# Altium PCB User_Interface.PcbDoc
Units mil, origin at the board's own origin, x right, y up, seen from the top; angles counter-clockwise.
Board outline 7874.02 x 5314.96 mil, 2 copper layers (Top Layer, Bottom Layer); 51 components, 43 nets, 132 pads, 0 vias.
Unrouted connection lines stored in the file: 89.
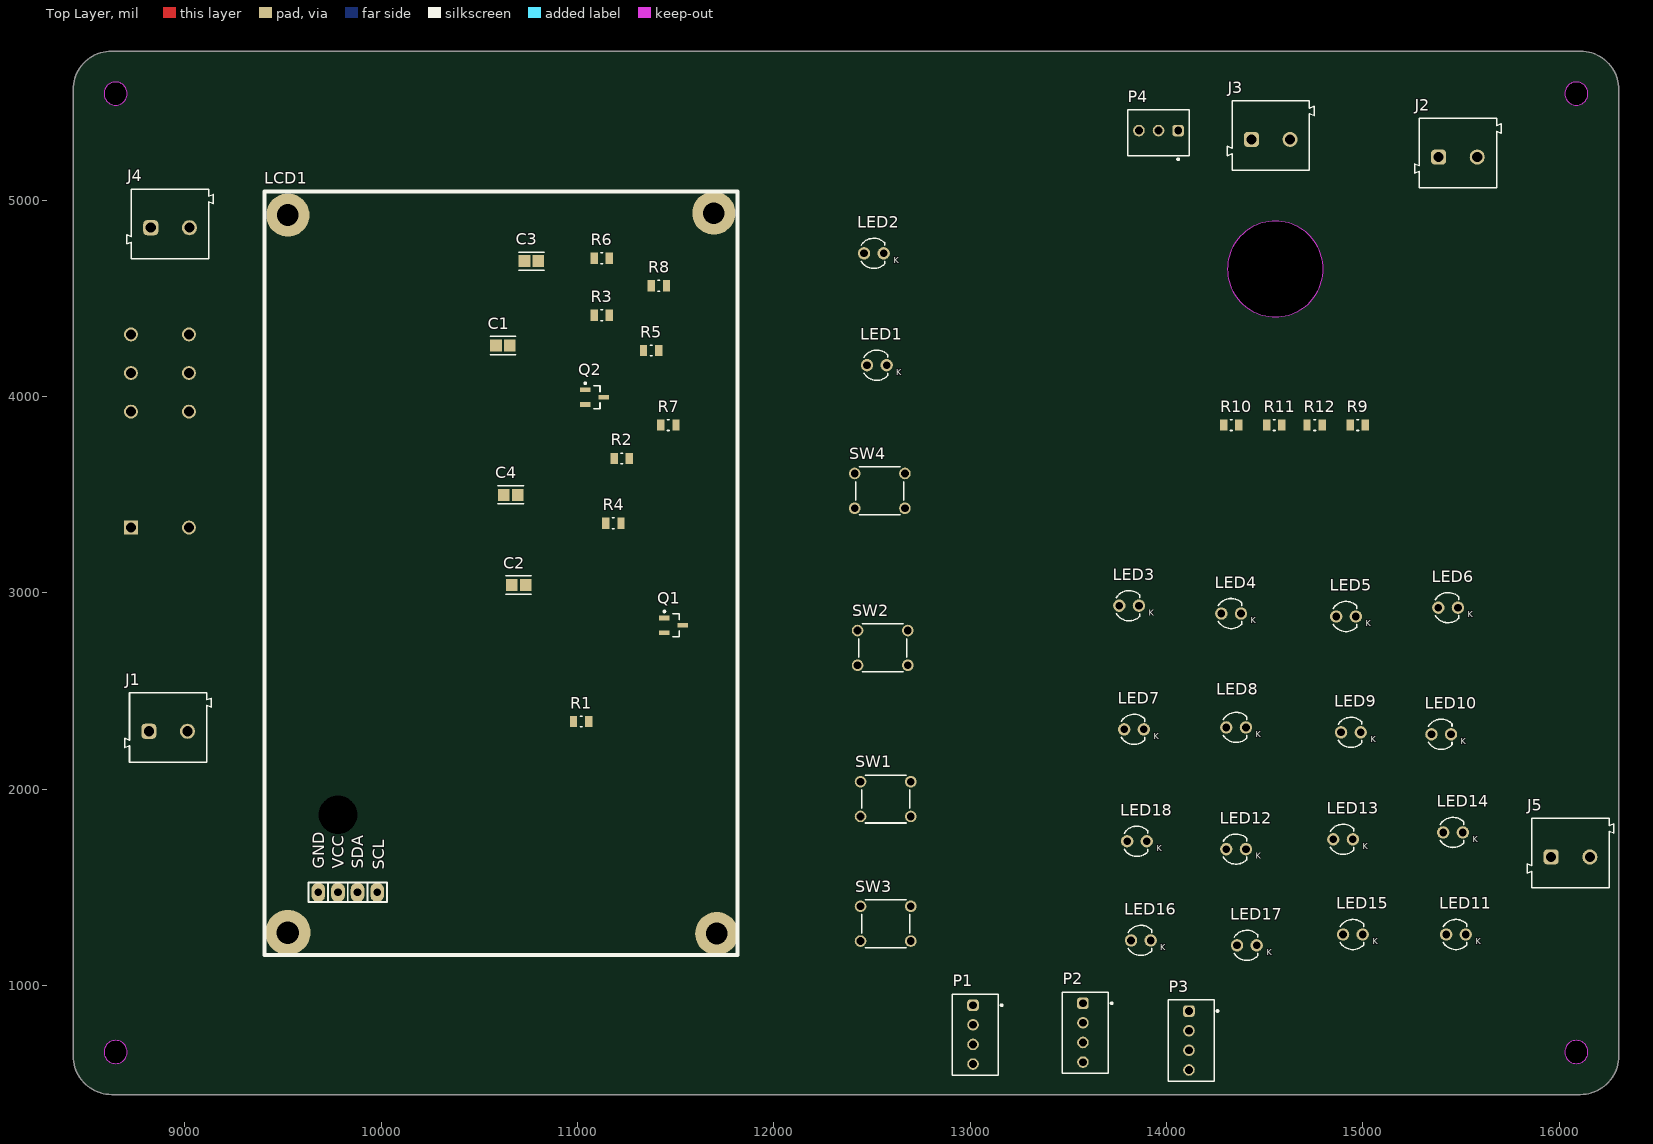
[diagram p0: Top Layer view]
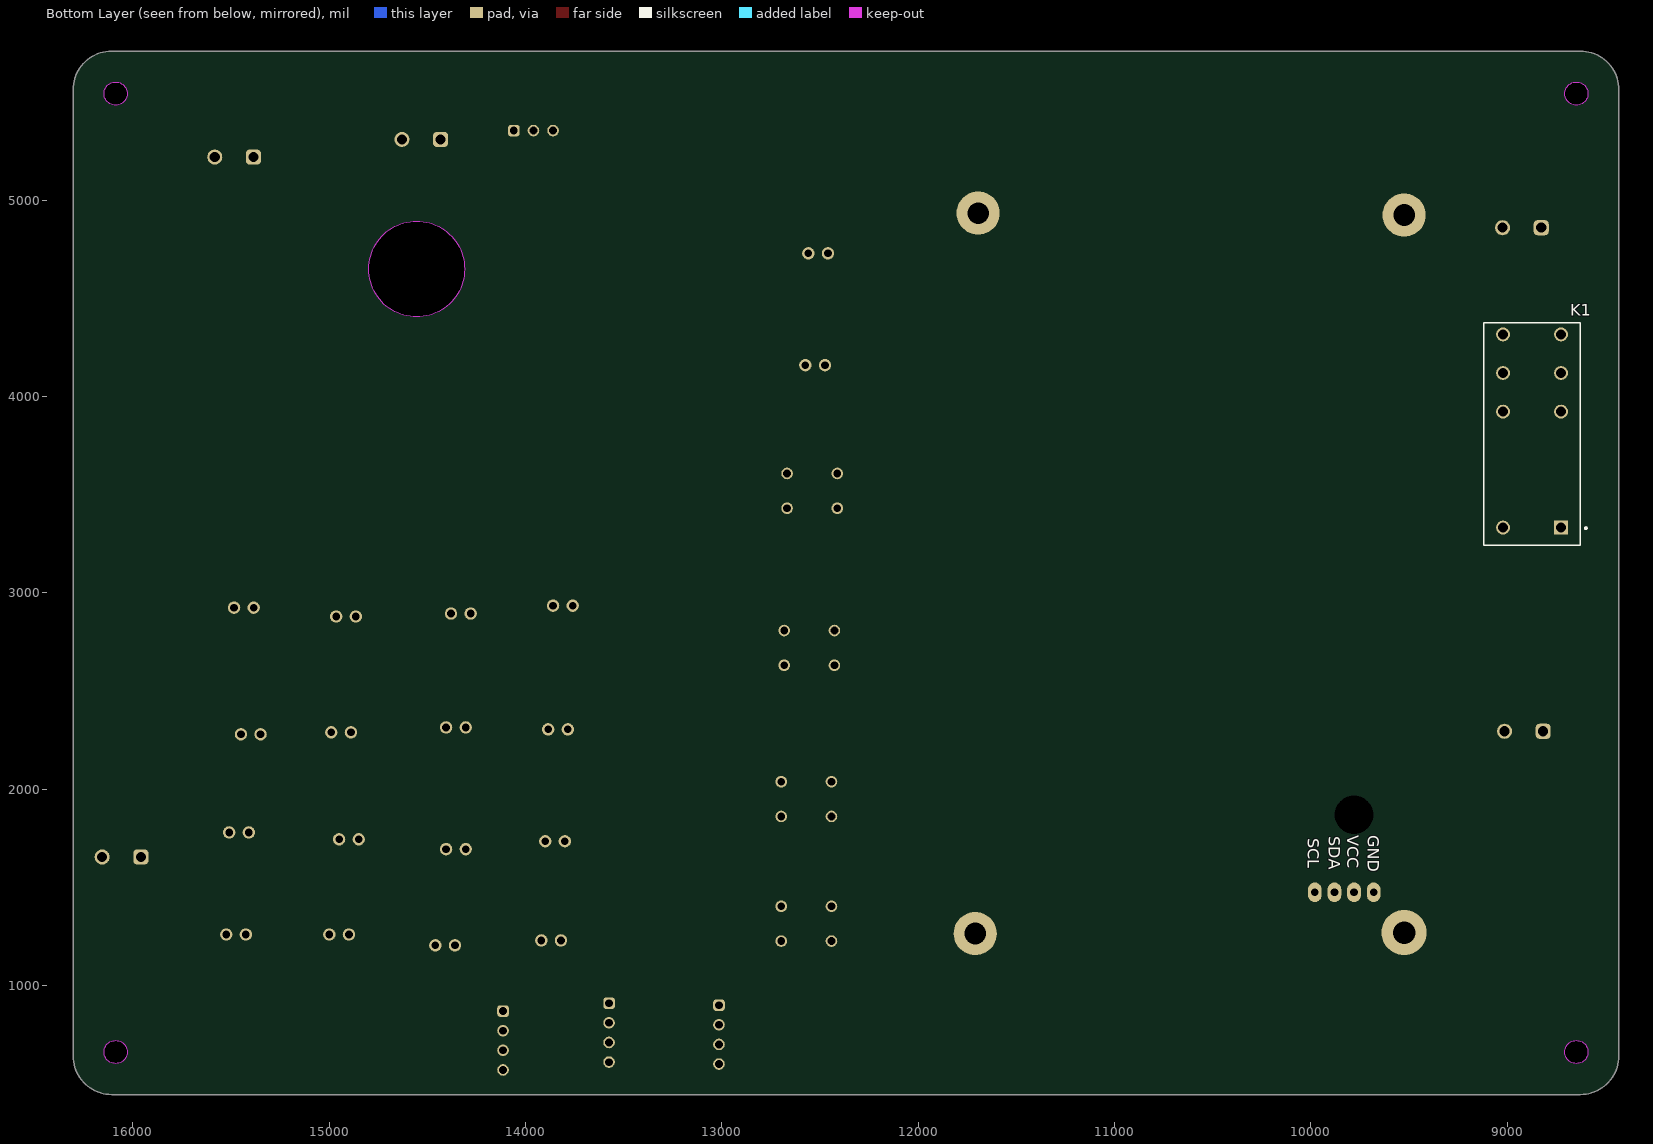
[diagram p1: Bottom Layer view, seen from below]

## Layer stack, top to bottom
Top Solder: solder mask 0.4, Solder Resist, Dk 3.5
Top Layer: signal copper 1.4
Dielectric 1: dielectric 12.6, FR-4, Dk 4.8
Bottom Layer: signal copper 1.4
Bottom Solder: solder mask 0.4, Solder Resist, Dk 3.5

## Board outline
8430.98,641.85 ccw(c8627.83,641.85) 8627.83,445 16108.15,445 ccw(c16108.15,641.85) 16305,641.85 16305,5563.11 ccw(c16108.15,5563.11) 16109.2,5759.96 8627.83,5759.96 ccw(c8627.83,5563.11) 8430.98,5563.11
cut-out: 14311.02,4650 ccw(c14555,4650) 14555,4406.02 ccw(c14555,4650) 14798.98,4650 ccw(c14555,4650) 14555,4893.98 ccw(c14555,4650)
cut-out: 8588.46,661.54 ccw(c8647.52,661.54) 8647.52,602.48 ccw(c8647.52,661.54) 8706.57,661.54 ccw(c8647.52,661.54) 8647.52,720.59 ccw(c8647.52,661.54)
cut-out: 16029.41,661.54 ccw(c16088.46,661.54) 16088.46,602.48 ccw(c16088.46,661.54) 16147.52,661.54 ccw(c16088.46,661.54) 16088.46,720.59 ccw(c16088.46,661.54)
cut-out: 16029.41,5543.43 ccw(c16088.46,5543.43) 16088.46,5484.37 ccw(c16088.46,5543.43) 16147.52,5543.43 ccw(c16088.46,5543.43) 16088.46,5602.48 ccw(c16088.46,5543.43)
cut-out: 8588.46,5543.43 ccw(c8647.52,5543.43) 8647.52,5484.37 ccw(c8647.52,5543.43) 8706.57,5543.43 ccw(c8647.52,5543.43) 8647.52,5602.48 ccw(c8647.52,5543.43)

## Design rules (kind name [scope] priority, off if disabled: settings)
Clearance [All] p1: gap=10 ignorepadtopadclearanceinfootprint=FALSE except(0: Arc-Hole Track-Hole SMDPad-Hole THPad-Hole Via-Hole Fill-Hole Poly-Hole Region-Hole Text-Hole)
PolygonConnect [All] p1: connectstyle=Relief reliefconductorwidth=10 reliefentries=4 polygonreliefangle="90 Angle" airgapwidth=10
RoomDefinition User_Interface [InComponentClass('User_Interface')] p1: confinementstyle=ConfineIn formatcopy=TRUE lockcomponents=FALSE outline 85,0 17330,0 17330,6380 85,6380
RoutingVias [All] p1: holewidth=28 width=50 viastyle="Through Hole" minholewidth=28 minwidth=50 maxholewidth=28 maxwidth=50
SolderMaskExpansion [All] p1: expansion=4 istentingtop=FALSE
Width [All] p1: maxlimit=10 minlimit=10 preferedwidth=10
30 further rules are at their usual default settings.

## Components (designator, comment, footprint, x,y, rotation, side; value= is the part's Value field where it differs from the comment)
C1 "C0805C224K5RACTU" FP-C0805C-DN-IPC_A 10620.46,4260 r0 top value="0.22 μF"
C2 "C0805C224K5RACTU" FP-C0805C-DN-IPC_A 10700.46,3040 r0 top value="0.22 μF"
C3 "C0805C224K5RACTU" FP-C0805C-DN-IPC_A 10765.46,4690 r0 top value="0.22 μF"
C4 "C0805C224K5RACTU" FP-C0805C-DN-IPC_A 10660.46,3500 r0 top value="0.22 μF"
J1 "691101710002" 691101710002 8915,2315 r0 top
J2 "691101710002" 691101710002 15485,5240 r0 top
J3 "691101710002" 691101710002 14531.58,5329.69 r0 top
J4 "691101710002" 691101710002 8925,4880 r0 top
J5 "691101710002" 691101710002 16058.43,1674.69 r0 top
K1 "G2RL-24-DC24" OMRON-G2RL-24_V 8873.35,3825 r90 bottom
LCD1 "2004_I2C" LCD2004_I2C 10900,3780 r90 top
LED1 "151033BS03000" "Type 3mm" 12525,4160 r0 top
LED2 "151033BS03000" "Type 3mm" 12510,4730 r0 top
LED3 "151033BS03000" "Type 3mm" 13810,2935 r0 top
LED4 "151033BS03000" "Type 3mm" 14330,2895 r0 top
LED5 "151033BS03000" "Type 3mm" 14915,2880 r0 top
LED6 "151033BS03000" "Type 3mm" 15435,2925 r0 top
LED7 "151033BS03000" "Type 3mm" 13835,2305 r0 top
LED8 "151033BS03000" "Type 3mm" 14355,2315 r0 top
LED9 "151033BS03000" "Type 3mm" 14940,2290 r0 top
LED10 "151033BS03000" "Type 3mm" 15400,2280 r0 top
LED11 "151033BS03000" "Type 3mm" 15475,1260 r0 top
LED12 "151033BS03000" "Type 3mm" 14355,1695 r0 top
LED13 "151033BS03000" "Type 3mm" 14900,1745 r0 top
LED14 "151033BS03000" "Type 3mm" 15460,1780 r0 top
LED15 "151033BS03000" "Type 3mm" 14950,1260 r0 top
LED16 "151033BS03000" "Type 3mm" 13870,1230 r0 top
LED17 "151033BS03000" "Type 3mm" 14410,1205 r0 top
LED18 "151033BS03000" "Type 3mm" 13850,1735 r0 top
P1 "61900411121" 61900411121 13026.81,750 r90 top
P2 "61900411121" 61900411121 13586.81,760 r90 top
P3 "61900411121" 61900411121 14126.81,720 r90 top
P4 "61900311121" 61900311121 13960,5343.19 r0 top
Q1 "BC847B" INF-SOT23_M 11490,2835 r0 top
Q2 "BC847B" INF-SOT23_M 11087.24,3997.4 r0 top
R1 "1K" FP-CRCW0805-e3-MFG 11018.39,2345 r0 top
R2 "10K" FP-CRCW0805-e3-MFG 11225,3685 r0 top
R3 "200" FP-CRCW0805-e3-MFG 11123.39,4415 r0 top
R4 "1K" FP-CRCW0805-e3-MFG 11183.39,3355 r0 top
R5 "10K" FP-CRCW0805-e3-MFG 11375,4235 r0 top
R6 "200" FP-CRCW0805-e3-MFG 11123.39,4705 r0 top
R7 "10K" FP-CRCW0805-e3-MFG 11463.39,3855 r0 top
R8 "1K" FP-CRCW0805-e3-MFG 11415,4565 r0 top
R9 "200" FP-CRCW0805-e3-MFG 14975,3855 r0 top
R10 "200" FP-CRCW0805-e3-MFG 14330,3855 r0 top
R11 "200" FP-CRCW0805-e3-MFG 14550,3855 r0 top
R12 "200" FP-CRCW0805-e3-MFG 14755,3855 r0 top
SW1 "430156043726" 4301x60437x6 12570,1950 r0 top
SW2 "430156043726" 4301x60437x6 12555,2720 r0 top
SW3 "430156043726" 4301x60437x6 12570,1315 r0 top
SW4 "430156043726" 4301x60437x6 12540,3520 r0 top

## Footprints (in the part's own frame and the unit in brackets; to place one, negate y for a bottom-side part, rotate by r counter-clockwise, add the part's x,y. Pads: shape width x height; smd on the part's side, far side on the other; paste and mask are expansions set on the pad)
4301x60437x6 [mm] "6x6mm Tact Switch, THT version"
  round 1.5 hole 1: A1(-3.25,2.25) A2(3.25,2.25) B1(-3.25,-2.25) B2(3.25,-2.25)
  silkscreen extent -3.1,-3.1 3.1,3.1, body extent -3.95,-3.1 3.95,3.1, height 4.35
61900311121 [mm] "2.54mm Male Locking Header, 3p"
  rrect50% 1.5x1.5 hole 1: 1(2.54,0.3)
  round 1.5 hole 1: 2(0,0.3) 3(-2.54,0.3)
  silkscreen extent -3.98,-3.52 3.98,2.98, body extent -3.81,-2.9 3.81,2.9, height 11.53
61900411121 [mm] "2.54mm Male Locking Header, 4p"
  rrect50% 1.5x1.5 hole 1: 1(3.81,0.3)
  round 1.5 hole 1: 2(1.27,0.3) 3(-1.27,0.3) 4(-3.81,0.3)
  silkscreen extent -5.25,-3.52 5.25,2.98, body extent -5.08,-2.9 5.08,2.9, height 11.53
691101710002 [mm] "5,00mm - modular - blue - Horizontal entry with pressure clamp - 12,6mm height - 02p"
  rrect50% 1.95x1.95 hole 1.3: 1(-2.5,-0.5)
  round 1.95 hole 1.3: 2(2.5,-0.5)
  silkscreen extent -5.6,-4.5 5.6,4.5, body extent -5.6,-4.5 5.6,4.5, height 12.65
FP-C0805C-DN-IPC_A [mil]
  rect 59.24x61.27 smd paste+0 mask+0: 1(-35.46,0) 2(35.46,0)
  silkscreen extent -65,-46 65,46, body extent -85,-50 85,50, height 10
FP-CRCW0805-e3-MFG [mm]
  rect 0.95x1.45 smd paste+0 mask+0: 1(-0.975,0) 2(0.975,0)
  silkscreen extent -0.13,-0.7 0.13,0.7, body extent -1.55,-0.82 1.55,0.82, height 0.25
INF-SOT23_M [mm] "SOT23, 3-Leads, Body 2.9x1.3 mm, Pitch 0.95 mm, IPC Low Density"
  rect 1.35x0.6 smd: 1(-1.2,0.95) 2(-1.2,-0.95) 3(1.2,0)
  silkscreen extent -1.32,-1.5 0.7,1.92, body extent -0.7,-1.5 0.7,1.5, height 1.1
LCD2004_I2C [mil]
  round 220 hole 110: 0(-2515,-810) 0(1145,1375) 0(1155,-795)
  round 230 hole 115: 0(-2510,1375)
  round 60 hole 196.85 unplated: 0(-1910,1120)
  oval 100x70 hole 40: 1(-2305,1220) 2(-2305,1120) 3(-2305,1020) 4(-2305,920)
  silkscreen extent -2625,-915 1265,1495, body extent -2610,-902 1248,1460, height 913
OMRON-G2RL-24_V [mm] "THD, 8-Leads, Body 28.8x12.5mm"
  rect 1.8x1.8 hole 1.3: 1(-12.5,-3.75)
  round 1.8 hole 1.3: 2(2.5,-3.75) 3(7.5,-3.75) 4(12.5,-3.75) 5(12.5,3.75) 6(7.5,3.75) 7(2.5,3.75) 8(-12.5,3.75)
  silkscreen extent -14.8,-7.1 14,6.25, body extent -14.8,-6.25 14,6.25, height 15.7
"Type 3mm" [mm] "THT, LED-3mm, 2pin- Body 4.15mm(max)"
  round 1.6 hole 1: 1(1.27,0) 2(-1.27,0)
  silkscreen extent -1.66,-1.95 1.4,1.95, body extent -1.93,-1.94 1.87,1.94, height 10.5

## Part data
C1 C2 C3 C4: library part CMP-1036-04552-2, "CAP CER 0.22UF 50V X7R 0805", Capacitance="0.22 μF", Manufacturer=KEMET, Package=C0805C-DN, Temperature="-55°C to +125°C", Temperature Characteristic=X7R, Temperature Coefficient=30ppm/°C, Temperature Range High=+125°C, Temperature Range Low=-55°C, Tolerance=0.1, Voltage Rating="50 V", Automotive=No, Category=Cap, ComponentLink2Description=Datasheet, ComponentLink2URL=https://content.kemet.com/datasheets/KEM_C1003_C0G_SMD.pdf, Device Class L1="Passive Components", Device Class L2=Capacitors, Device Class L3="Ceramic Capacitors", Digikey Description="CAP CER 0.22UF 50V X7R 0805", Height=0.88mm, Ipc Land Pattern Name=CAPC200125X78, Lead Free=Yes, Manufacturer Part Number=C0805C224K5RACTU, Material=Ceramic, Mouser Description="CAP CER 0.22UF 50V X7R 0805", Octopart=https://octopart.com/c0805c224k5ractu-kemet-144670, RoHS=TRUE
J1 J2 J3 J4 J5: "WR-TBL Series 101 Horizontal Entry Modular, THT, pitch 5mm, 2p", Manufacturer="Wurth Elektronik", Operating Temperature Max=105°C, Operating Temperature Min=-40°C, Rated Current=16A, Working Voltage=250V, Application="Pressure Clamp", Category="Terminal Blocks", ComponentLink1Description="Website Link", ComponentLink1URL=https://www.we-online.com/redexpert/article/691101710002?ad, ComponentLink2Description="Datasheet Link", ComponentLink2URL=https://www.we-online.com/redexpert/spec/691101710002?ad, Manufacturer Part Number=691101710002, Match Code=WR-TBL, Modularity=Yes, Mount="Through Hole", Number of Pins=2, Number of Rows=1, Orientation=Horizontal, Packaging=Box, Pitch=5mm
K1: library part CMP-2000-06305-1, "Low Profile Power Relay with 15.7 mm Height, Ideal for Incorporation in Miniature Equipment, 24 V, -40 to 85 degC, 8-Pin THD, RoHS, Bulk", Coil Current=16.7mA, Coil Resistance=1.44kOhms, Coil Voltage=24V, Manufacturer=Omron, Package Description="8-Pin Through Hole Device, Body 28.8 x 12.5 mm", Package Reference=G2RL-24, Power Consumption=400mW, Brand=OmronElectronics, Coil Type=Non-Latching, Contact Form=DPDT(2FormC), Contact Material=SilverNickel, Contact Termination=Pin, Datasheet URL=http://www.omron.com/ecb/products/pdf/en-g2rl.pdf, Datasheet Version=03/2016, Factory Pack Quantity=20, Height=15.7mm, Length=29mm, Manufacturer URL=http://www.omron.com/, Mounting Style=ThroughHole, Mounting Technology=ThroughHole, Product=PowerRelays, Product Category=GeneralPurposeRelays, RoHS=Details, Series=G2RL-2, Type=HighCurrent, Width=12.7mm
LCD1: library part LCD2004_I2C
LED1 LED2 LED3 LED4 LED5 LED6 LED7 LED8 LED9 LED10 LED11 LED12 LED13 LED14 LED15 LED16 LED17 LED18: "THT LED round mono-color waterclear, WL-TMRW , Blue", Emitting color=Blue, Manufacturer="Wuerth Elektronik", ComponentLink1Description="Manufacturer URL", ComponentLink1URL=http://www.we-online.com, ComponentLink2Description=Datasheet, ComponentLink2URL=http://katalog.we-online.de/pbs/datasheet/7448042001.pdfhttp://katalog.we-online.de/pbs/datasheet/7448042001.pdfhttp://katalog.we-online.de/pbs/datasheet/7448042001.pdfhttp://katalog.we-online.de/pbs/datasheet/151033BS03000.pdf, PackageReference="Type 3mm", PartNumber=151033BS03000
P1 P2 P3: "WR-WTB THT Male Vertical Locking Header, pitch 2.54mm, 4pins", Contact Resistance=20mΩ, Manufacturer="Wurth Elektronik", Operating Temperature Max=105°C, Operating Temperature Min=-40°C, Rated Current=3A, Withstanding Voltage=1000VAC, Working Voltage=250VAC, Category="Wire-to-Board Connectors", ComponentLink1Description="Website Link", ComponentLink1URL=https://www.we-online.com/redexpert/article/61900411121?ad, ComponentLink2Description="Datasheet Link", ComponentLink2URL=https://www.we-online.com/redexpert/spec/61900411121?ad, Gender=Male, Height=11.5mm, Length=10.16mm, Manufacturer Part Number=61900411121, Match Code=WR-WTB, Mount="Through Hole", Number of Pins=4, Number of Rows=1, Orientation=Vertical, Packaging=Bag, Pitch=2.54mm, Width=5.8mm
P4: "WR-WTB THT Male Vertical Locking Header, pitch 2.54mm, 3pins", Contact Resistance=20mΩ, Manufacturer="Wurth Elektronik", Operating Temperature Max=105°C, Operating Temperature Min=-40°C, Rated Current=3A, Withstanding Voltage=1000VAC, Working Voltage=250VAC, Category="Wire-to-Board Connectors", ComponentLink1Description="Website Link", ComponentLink1URL=https://www.we-online.com/redexpert/article/61900311121?ad, ComponentLink2Description="Datasheet Link", ComponentLink2URL=https://www.we-online.com/redexpert/spec/61900311121?ad, Gender=Male, Height=11.5mm, Length=7.62mm, Manufacturer Part Number=61900311121, Match Code=WR-WTB, Mount="Through Hole", Number of Pins=3, Number of Rows=1, Orientation=Vertical, Packaging=Bag, Pitch=2.54mm, Width=5.8mm
Q1 Q2: library part CMP-1177-00042-1, "NPN Silicon AF Transistor, 45 V VCEO, 100 mA IC, SOT23, Reel, Green", Manufacturer=Infineon, ComponentLink1Description="Manufacturer URL", ComponentLink1URL=http://www.infineon.com/, ComponentLink2Description=Datasheet, ComponentLink2URL=http://www.infineon.com/dgdl/bc847series_bc848series_bc849series_bc850series.pdf?folderId=db3a304314dca389011541d30fa21656&fileId=db3a304314dca389011541d4630a1657, ComponentLink3Description="Package Specification", ComponentLink3URL=http://www.infineon.com/dgdl/SOT23-Package_Overview.pdf?folderId=db3a30431936bc4b0119532290053c66&fileId=db3a30431936bc4b0119533468123c85, fT (typ)="250Â MHz", Green=TRUE, IBM (max)="200Â mA", IC (max)="100Â mA", ICBO (max)="15Â nA", ICM (max)="200Â mA", Mounting Technology="Surface Mount", PackageDescription="3-Pin Small Outline Transistor Package, 1.3 x 2.9 mm Body, 0.95 mm Pitch", PackageReference=SOT23, PackageVersion=Apr-08, Packing=Reel, PartNumber=BC847B, Polarity=NPN, Ptot (max)="330Â mW", VCBO (max)="50Â V", VCEO (max)="45Â V", VEBO (max)="6Â V"
R1 R2 R5 R7: library part CMP-2001-04908-2, "RES Thick Film, 10kΩ, 1%, 0.125W, 100ppm/°C, 0805", Case Code (Imperial)=0805, Case Code (Metric)=2012, Max Operating Temperature=155°C, Min Operating Temperature=-55°C, Package Quantity=5000, Power Rating=125mW, Resistance=10kR, Temperature Coefficient=100ppm/°C, Tolerance=1%, Voltage Rating=150V, Case/Package=0805, Composition="Thick Film", Contact Plating=Tin, Depth=1.25mm, Height=0.45mm, Lead Free="Lead Free", Length=2mm, Military Standard=Not, Packaging="Tape and Reel", Radiation Hardening=No, Termination=SMD/SMT, Voltage Rating (DC)=150V, Weight=0.000194oz, Width=1.25mm
R3 R6 R9 R10 R11 R12: library part CMP-2001-04908-2, "RES Thick Film, 200Ω, 1%, 0.125W, 100ppm/°C, 0805", Case Code (Imperial)=0805, Case Code (Metric)=2012, Max Operating Temperature=155°C, Min Operating Temperature=-55°C, Package Quantity=5000, Power Rating=125mW, Resistance=10kR, Temperature Coefficient=100ppm/°C, Tolerance=1%, Voltage Rating=150V, Case/Package=0805, Composition="Thick Film", Contact Plating=Tin, Depth=1.25mm, Height=0.45mm, Lead Free="Lead Free", Length=2mm, Military Standard=Not, Packaging="Tape and Reel", Radiation Hardening=No, Termination=SMD/SMT, Voltage Rating (DC)=150V, Weight=0.000194oz, Width=1.25mm
R4 R8: library part CMP-2001-04908-2, "RES Thick Film, 1kΩ, 1%, 0.125W, 100ppm/°C, 0805", Case Code (Imperial)=0805, Case Code (Metric)=2012, Max Operating Temperature=155°C, Min Operating Temperature=-55°C, Package Quantity=5000, Power Rating=125mW, Resistance=10kR, Temperature Coefficient=100ppm/°C, Tolerance=1%, Voltage Rating=150V, Case/Package=0805, Composition="Thick Film", Contact Plating=Tin, Depth=1.25mm, Height=0.45mm, Lead Free="Lead Free", Length=2mm, Military Standard=Not, Packaging="Tape and Reel", Radiation Hardening=No, Termination=SMD/SMT, Voltage Rating (DC)=150V, Weight=0.000194oz, Width=1.25mm
SW1 SW2 SW3 SW4: "WS-TATV THT Tact Switch 6x6mm, SPST-NO, 12VDC, 50mA, 260g", Manufacturer="Wurth Elektronik", Operating Temperature Max=85°C, Operating Temperature Min=-40°C, Rated Current=50mA, Rated Voltage=12VDC, Category="Tact Switches", Circuit=SPST-NO, ComponentLink1Description="Website Link", ComponentLink1URL=https://www.we-online.com/redexpert/article/430156043726?ad, ComponentLink2Description="Datasheet Link", ComponentLink2URL=https://www.we-online.com/redexpert/spec/430156043726?ad, Contact Material="Stainless Steel", Contact Plating=Silver, Height=4.3mm, Length=6mm, Manufacturer Part Number=430156043726, Match Code=WS-TATV, Mount="Through Hole", Operation Force=260g, Packaging=Bulk, Terminal Material="Copper Alloy", Terminal Plating=Silver, Washable=No, Width=6mm

## Nets (pads, with @x,y where several pads share a name; then routed paths per layer and width w, separated by ;. In a path a pad name is that pad's centre, name@x,y a point inside that pad or via, vN(x,y) a via of type N, cw(c..) or ccw(c..) an arc to the next point about the centre after c; other vN are vias at no path point)
+5: J3.2 K1.1 P4.1 R3.2 R6.2
GND: C1.1 C2.1 C3.1 J1.2 J3.1 K1.3 LCD1.0 P2.4 P4.3 Q1.2 Q2.2 R2.1 R5.1 R8.1 SW1.A1 SW1.A2 SW2.A1 SW2.A2 SW3.A1 SW3.A2
NetC1_2: C1.2 P2.1 SW1.B1 SW1.B2
NetC2_2: C2.2 P2.2 SW2.B1 SW2.B2
NetC3_2: C3.2 P2.3 SW3.B1 SW3.B2
NetC4_1: C4.1 P3.4 SW4.A1 SW4.A2
NetC4_2: C4.2 P3.3 SW4.B1 SW4.B2
NetJ1_1: J1.1 K1.6 R7.2
NetJ2_1: J2.1 K1.2
NetJ2_2: J2.2 K1.7
NetJ4_1: J4.1 K1.4
NetJ4_2: J4.2 K1.5
NetJ5_1: J5.1 R9.2 R10.2 R11.2 R12.2
NetJ5_2: J5.2 LED15.1 LED16.1 LED17.1 LED18.1
NetK1_8: K1.8 LED2.1 Q2.3
NetLCD1_1: LCD1.1 P1.4
NetLCD1_2: LCD1.2 P1.3
NetLCD1_3: LCD1.3 P1.2
NetLCD1_4: LCD1.4 P1.1
NetLED1_1: LED1.1 Q1.3
NetLED1_2: LED1.2 R6.1
NetLED2_2: LED2.2 R3.1
NetLED3_1: LED3.1 LED7.2
NetLED3_2: LED3.2 R10.1
NetLED4_1: LED4.1 LED8.2
NetLED4_2: LED4.2 R11.1
NetLED5_1: LED5.1 LED9.2
NetLED5_2: LED5.2 R12.1
NetLED6_1: LED6.1 LED10.2
NetLED6_2: LED6.2 R9.1
NetLED7_1: LED7.1 LED11.2
NetLED8_1: LED8.1 LED12.2
NetLED9_1: LED9.1 LED13.2
NetLED10_1: LED10.1 LED14.2
NetLED11_1: LED11.1 LED15.2
NetLED12_1: LED12.1 LED16.2
NetLED13_1: LED13.1 LED17.2
NetLED14_1: LED14.1 LED18.2
NetP3_1: P3.1 R4.1
NetP3_2: P3.2 R1.1
NetP4_2: P4.2 R7.1 R8.2
NetQ1_1: Q1.1 R1.2 R2.2
NetQ2_1: Q2.1 R4.2 R5.2

## Silkscreen, mask and mechanical layers (free items; w line width, h text height)
Mechanical 1:
  circle w10: c14555,4650 r243.98
  circle w0.5: c8647.52,661.54 r59.06
  circle w0.5: c16088.46,661.54 r59.06
  circle w0.5: c8647.52,5543.43 r59.06
  circle w0.5: c16088.46,5543.43 r59.06
  pour cut-out: 8588.46,5543.43 ccw(c8647.52,5543.43) 8647.52,5484.37 ccw(c8647.52,5543.43) 8706.57,5543.43 ccw(c8647.52,5543.43) 8647.52,5602.48 ccw(c8647.52,5543.43)
  lines w0.5: 16108.15,445 ccw(c16108.15,641.85) 16305,641.85 16305,5563.11 ccw(c16108.15,5563.11) 16109.2,5759.96 8627.83,5759.96 ccw(c8627.83,5563.11) 8430.98,5563.11 8430.98,641.85 ccw(c8627.83,641.85) 8627.83,445 16109.13,445

## Text inside footprints (layer, text, board x,y; h text height)
LCD1: Top Overlay "SCL" at 10015,1590 h60 r90; Top Overlay "SDA" at 9910,1595 h60 r90; Top Overlay "VCC" at 9810,1595 h60 r90; Top Overlay "GND" at 9710,1595 h60 r90; Bottom Overlay "GND" at 9710,1765 h60 r90; Bottom Overlay "VCC" at 9815,1765 h60 r90; Bottom Overlay "SDA" at 9910,1760 h60 r90; Bottom Overlay "SCL" at 10015,1750 h60 r90
LED1: Top Overlay "K" at 12625,4110 h30; Mechanical 15 "K" at 12625,4110 h30
LED2: Top Overlay "K" at 12610,4680 h30; Mechanical 15 "K" at 12610,4680 h30
LED3: Top Overlay "K" at 13910,2885 h30; Mechanical 15 "K" at 13910,2885 h30
LED4: Top Overlay "K" at 14430,2845 h30; Mechanical 15 "K" at 14430,2845 h30
LED5: Top Overlay "K" at 15015,2830 h30; Mechanical 15 "K" at 15015,2830 h30
LED6: Top Overlay "K" at 15535,2875 h30; Mechanical 15 "K" at 15535,2875 h30
LED7: Top Overlay "K" at 13935,2255 h30; Mechanical 15 "K" at 13935,2255 h30
LED8: Top Overlay "K" at 14455,2265 h30; Mechanical 15 "K" at 14455,2265 h30
LED9: Top Overlay "K" at 15040,2240 h30; Mechanical 15 "K" at 15040,2240 h30
LED10: Top Overlay "K" at 15500,2230 h30; Mechanical 15 "K" at 15500,2230 h30
LED11: Top Overlay "K" at 15575,1210 h30; Mechanical 15 "K" at 15575,1210 h30
LED12: Top Overlay "K" at 14455,1645 h30; Mechanical 15 "K" at 14455,1645 h30
LED13: Top Overlay "K" at 15000,1695 h30; Mechanical 15 "K" at 15000,1695 h30
LED14: Top Overlay "K" at 15560,1730 h30; Mechanical 15 "K" at 15560,1730 h30
LED15: Top Overlay "K" at 15050,1210 h30; Mechanical 15 "K" at 15050,1210 h30
LED16: Top Overlay "K" at 13970,1180 h30; Mechanical 15 "K" at 13970,1180 h30
LED17: Top Overlay "K" at 14510,1155 h30; Mechanical 15 "K" at 14510,1155 h30
LED18: Top Overlay "K" at 13950,1685 h30; Mechanical 15 "K" at 13950,1685 h30